# Altium PCB hardware.PcbDoc
Units mm, origin at the board's own origin, x right, y up, seen from the top; angles counter-clockwise.
Board outline 123.32 x 185.55 mm, 2 copper layers (Top Layer, Bottom Layer); 18 components, 34 nets, 119 pads, 30 vias.
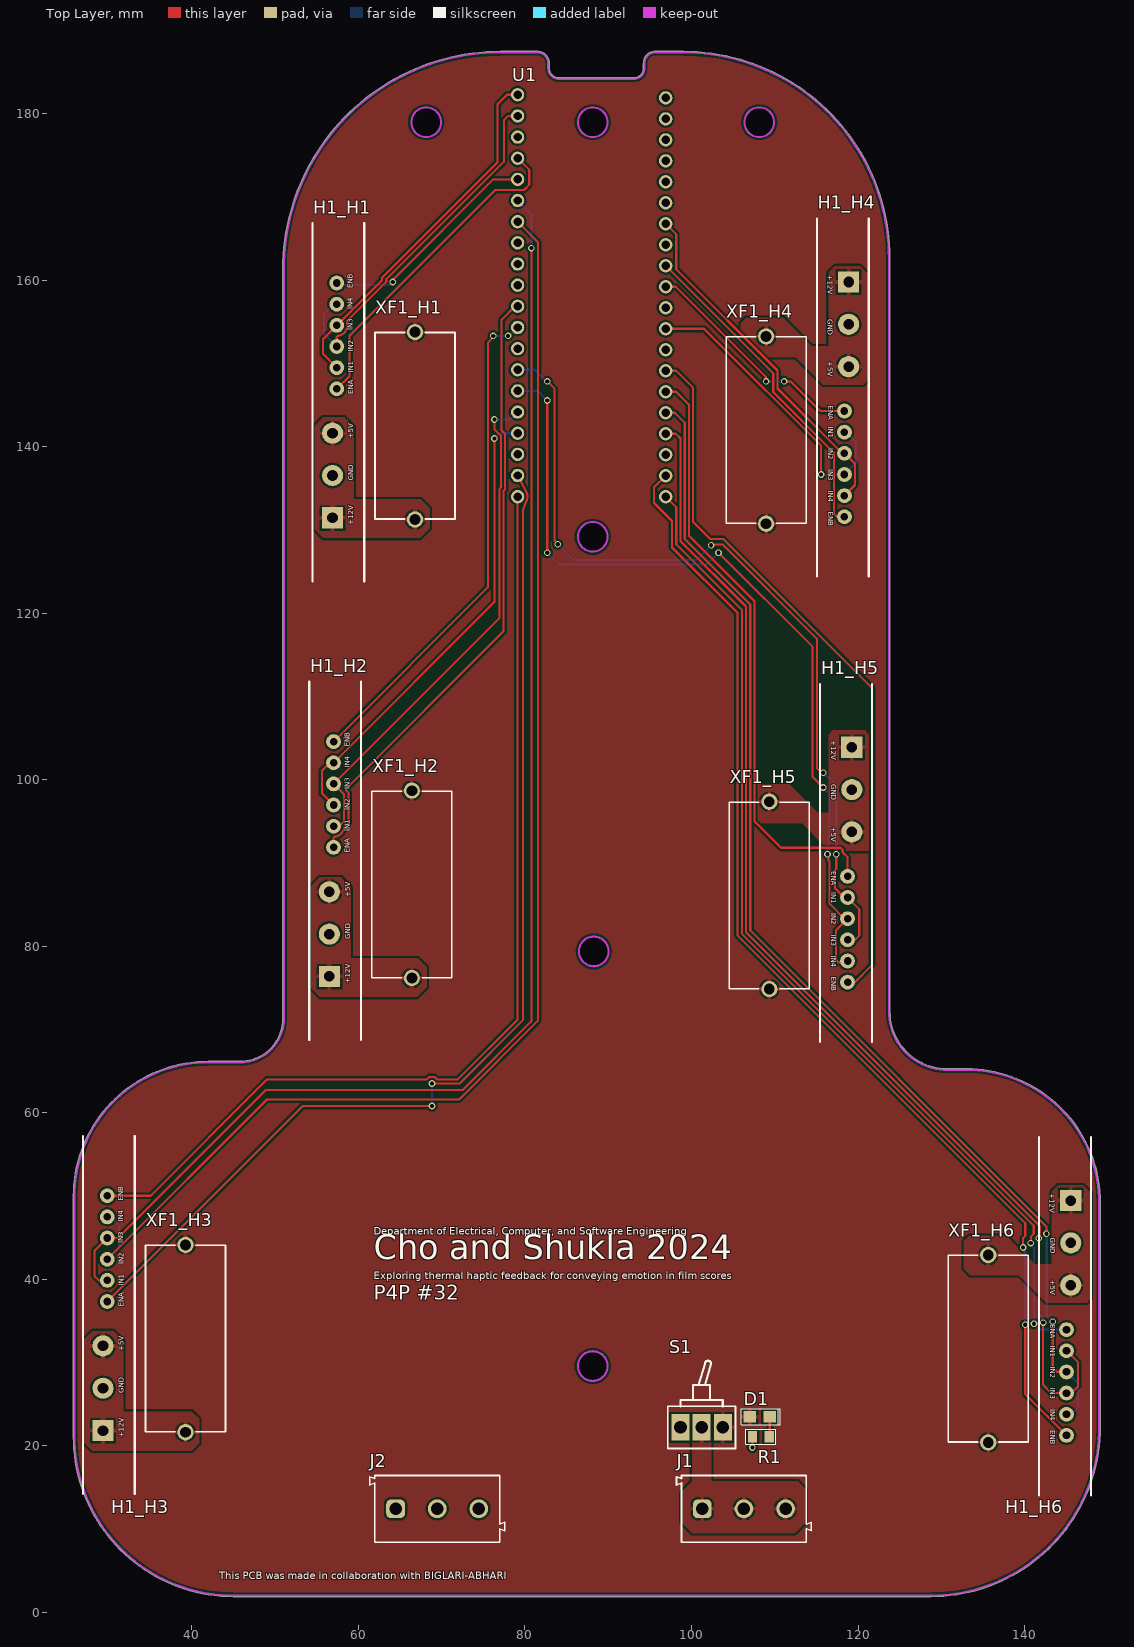
[diagram p0: Top Layer view]
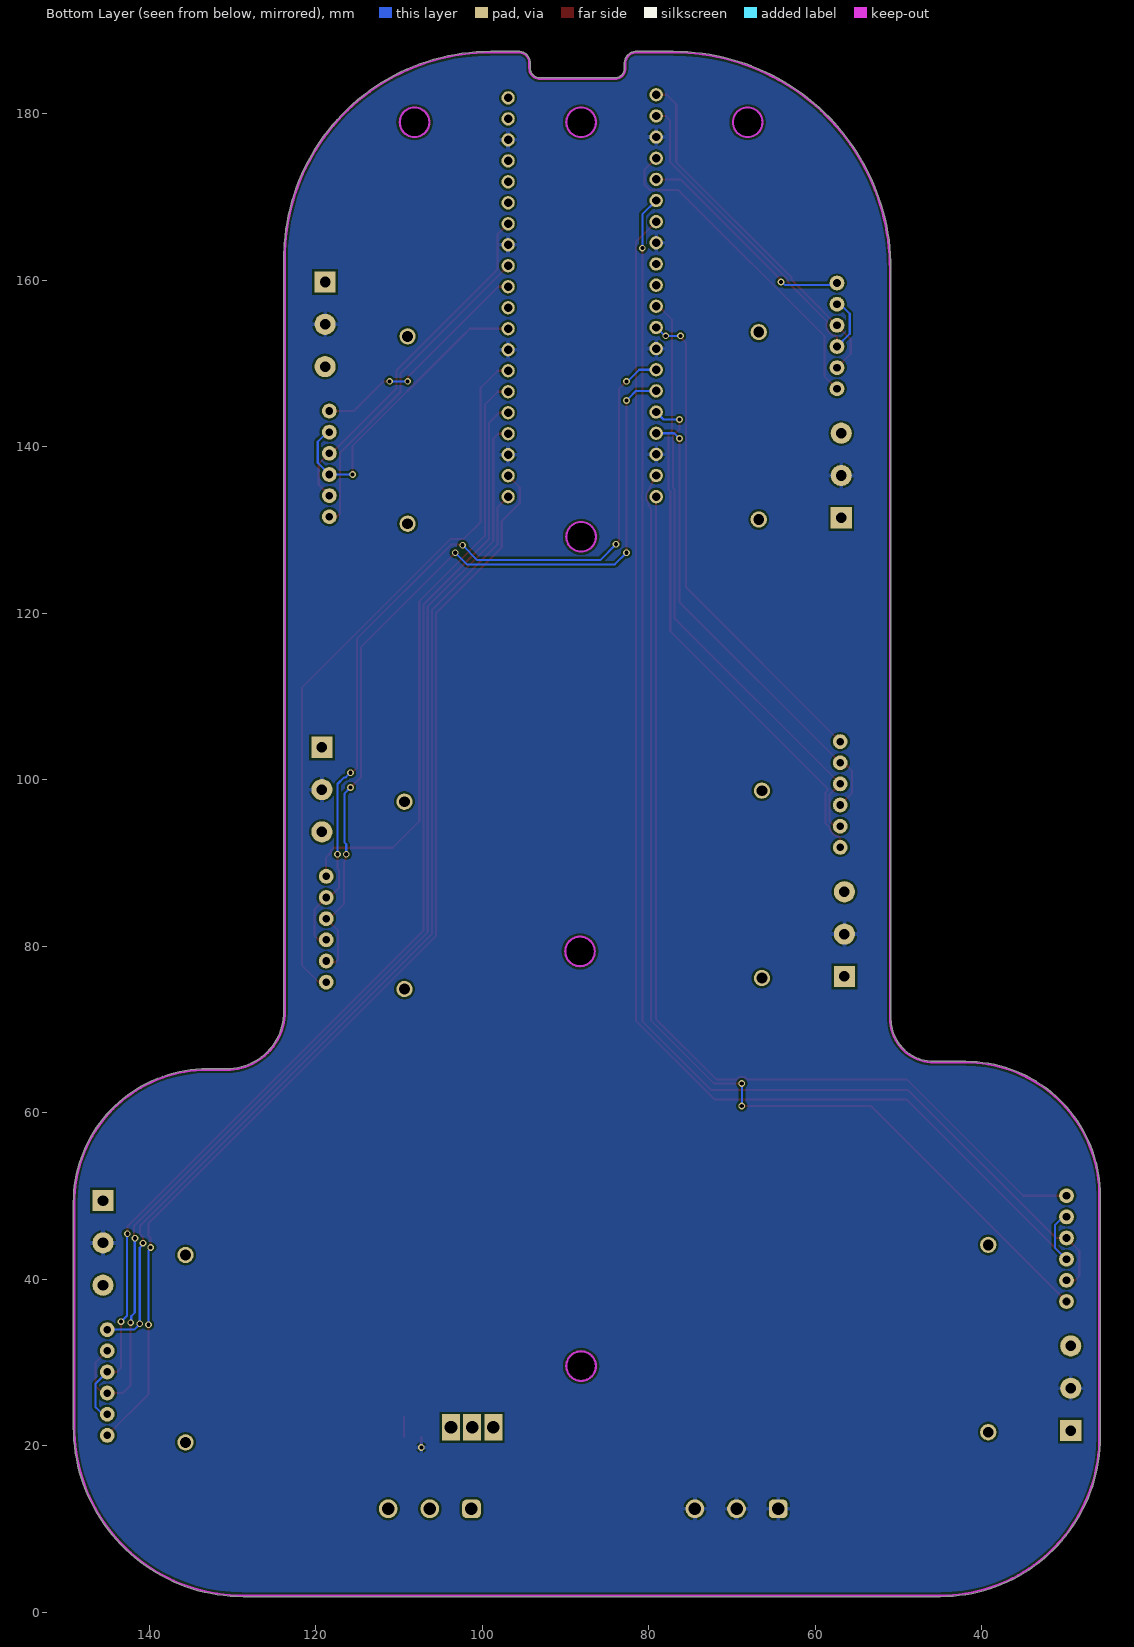
[diagram p1: Bottom Layer view, seen from below]

## Layer stack, top to bottom
Top Solder: solder mask 0.0102, Solder Resist, Dk 3.5
Top Layer: signal copper 0.0356
Dielectric 1: dielectric 0.32, FR-4, Dk 4.8
Bottom Layer: signal copper 0.0356
Bottom Solder: solder mask 0.0102, Solder Resist, Dk 3.5

## Board outline
25.781,21.111 ccw(c44.987,21.111) 44.987,1.905 128.727,1.905 ccw(c128.727,22.276) 149.098,22.276 149.098,49.196 ccw(c133.016,49.196) 133.016,65.278 130.71,65.278 cw(c130.71,72.163) 123.825,72.163 123.825,162.616 ccw(c98.989,162.616) 98.989,187.452 95.631,187.452 ccw(c95.631,186.055) 94.234,186.055 94.234,185.42 cw(c93.091,185.42) 93.091,184.277 84.074,184.277 cw(c84.074,185.42) 82.931,185.42 82.931,186.024 ccw(c81.503,186.024) 81.503,187.452 77.089,187.452 ccw(c77.089,161.29) 50.927,161.29 50.927,71.31 cw(c45.784,71.31) 45.784,66.167 41.949,66.167 ccw(c41.949,49.999) 25.781,49.999
cut-out: 108.138,177.165 cw(c108.138,178.943) 106.36,178.943 cw(c108.138,178.943) 108.138,180.721 cw(c108.138,178.943) 109.916,178.943 cw(c108.138,178.943)
cut-out: 68.138,177.165 cw(c68.138,178.943) 66.36,178.943 cw(c68.138,178.943) 68.138,180.721 cw(c68.138,178.943) 69.916,178.943 cw(c68.138,178.943)
cut-out: 86.36,29.591 ccw(c88.138,29.591) 88.138,27.813 ccw(c88.138,29.591) 89.916,29.591 ccw(c88.138,29.591) 88.138,31.369 ccw(c88.138,29.591)
cut-out: 86.487,79.375 ccw(c88.265,79.375) 88.265,77.597 ccw(c88.265,79.375) 90.043,79.375 ccw(c88.265,79.375) 88.265,81.153 ccw(c88.265,79.375)
cut-out: 88.138,177.165 cw(c88.138,178.943) 86.36,178.943 cw(c88.138,178.943) 88.138,180.721 cw(c88.138,178.943) 89.916,178.943 cw(c88.138,178.943)
cut-out: 88.138,127.381 cw(c88.138,129.159) 86.36,129.159 cw(c88.138,129.159) 88.138,130.937 cw(c88.138,129.159) 89.916,129.159 cw(c88.138,129.159)

## Design rules (kind name [scope] priority, off if disabled: settings)
Clearance [All] p1: gap=0.254 ignorepadtopadclearanceinfootprint=FALSE except(0: Arc-Hole Track-Hole SMDPad-Hole THPad-Hole Via-Hole Fill-Hole Poly-Hole Region-Hole Text-Hole)
PlaneConnect [InNet('VCC')] p1: planeconnectstyle=Relief reliefexpansion=0.508 reliefentries=4 reliefconductorwidth=0.254 reliefairgap=0.254
PolygonConnect PolygonConnect_1 [All] p1: connectstyle=Relief reliefconductorwidth=0.508 reliefentries=4 polygonreliefangle="90 Angle" airgapwidth=0.254
RoomDefinition H4 [InComponentClass('H4')] p1: confinementstyle=ConfineIn formatcopy=TRUE lockcomponents=FALSE outline 103.632,123.952 121.666,123.952 121.666,167.767 103.632,167.767
RoomDefinition H1 [InComponentClass('H1')] p2: confinementstyle=ConfineIn formatcopy=TRUE lockcomponents=FALSE outline 54.102,123.444 72.136,123.444 72.136,167.259 54.102,167.259
RoomDefinition H3 [InComponentClass('H3')] p3: confinementstyle=ConfineIn formatcopy=TRUE lockcomponents=FALSE outline 26.543,13.843 44.577,13.843 44.577,57.658 26.543,57.658
RoomDefinition H6 [InComponentClass('H6')] p4: confinementstyle=ConfineIn formatcopy=TRUE lockcomponents=FALSE outline 130.302,13.642 148.336,13.642 148.336,57.457 130.302,57.457
RoomDefinition H2 [InComponentClass('H2')] p5: confinementstyle=ConfineIn formatcopy=TRUE lockcomponents=FALSE outline 53.721,68.379 71.755,68.379 71.755,112.194 53.721,112.194
RoomDefinition H5 [InComponentClass('H5')] p6: confinementstyle=ConfineIn formatcopy=TRUE lockcomponents=FALSE outline 104.013,68.072 122.047,68.072 122.047,111.887 104.013,111.887
RoutingVias [All] p1: holewidth=0.711 width=1.27 viastyle="Through Hole" minholewidth=0.711 minwidth=1.27 maxholewidth=0.711 maxwidth=1.27
SolderMaskExpansion [All] p1: expansion=0.102 istentingtop=FALSE
Width [All] p1: maxlimit=0.254 minlimit=0.254 preferedwidth=0.254
29 further rules are at their usual default settings.

## Classes and differential pairs
channel class HBridgeInterface: H1 H2 H3 H4 H5 H6
component class HardwareSchematicv2: J1 J2 S1 U1
component class H6: H1_H6 XF1_H6
component class H5: H1_H5 XF1_H5
component class H4: H1_H4 XF1_H4
component class H3: H1_H3 XF1_H3
component class H2: H1_H2 XF1_H2
component class H1: H1_H1 XF1_H1

## Components (designator, comment, footprint, x,y, rotation, side; value= is the part's Value field where it differs from the comment)
D1 "LED_SMT_0805" "0805 LED" 108.204,23.495 r0 top
H1_H1 "L298N Module" "New footprint 1"#1 60.706,123.825 r90 top (schematic designator H1)
H1_H2 "L298N Module" "New footprint 1"#1 60.325,68.76 r90 top (schematic designator H1)
H1_H3 "L298N Module" "New footprint 1"#1 33.147,14.224 r90 top (schematic designator H1)
H1_H4 "L298N Module" "New footprint 1"#1 115.062,167.386 r270 top (schematic designator H1)
H1_H5 "L298N Module" "New footprint 1"#1 115.443,111.506 r270 top (schematic designator H1)
H1_H6 "L298N Module" "New footprint 1"#1 141.732,57.076 r270 top (schematic designator H1)
J1 "691111710003" 691111710003 106.299,12.446 r0 top
J2 "691111710003" 691111710003 69.469,12.446 r0 top
R1 "Res_SMT_0805" "0805 RES" 108.331,21.082 r180 top
S1 "SW-SPDT" SW-SPDT 98.679,22.225 r0 top
U1 "Pico Pi W" "New footprint 1"#2 79.121,182.245 r0 top
XF1_H1 "696103201002" 696103201002 66.802,142.494 r270 top (schematic designator XF1)
XF1_H2 "696103201002" 696103201002 66.421,87.429 r270 top (schematic designator XF1)
XF1_H3 "696103201002" 696103201002 39.243,32.893 r270 top (schematic designator XF1)
XF1_H4 "696103201002" 696103201002 108.966,141.986 r90 top (schematic designator XF1)
XF1_H5 "696103201002" 696103201002 109.347,86.106 r90 top (schematic designator XF1)
XF1_H6 "696103201002" 696103201002 135.636,31.676 r90 top (schematic designator XF1)

## Footprints (in the part's own frame and the unit in brackets; to place one, negate y for a bottom-side part, rotate by r counter-clockwise, add the part's x,y. Pads: shape width x height; smd on the part's side, far side on the other; paste and mask are expansions set on the pad)
"0805 LED" [mm] "RED AS AlGaAs SMD LED, Body; 2mm x 1.25 mm (LxW)"
  rect 1.5x1.4 smd: 1(-1.2,0) 2(1.2,0)
  silkscreen extent -2.2,-0.95 2.45,0.95, body extent -1,-0.63 1,0.63, height 1.1
"0805 RES" [mm] "http://www.digikey.co.nz/Web%20Export/Supplier%20Content/Vishay_8026/PDF/VishayBeyschlag_SolderPad.pdf?redirected=1 with dimension G modified by +0.25mm"
  rect 1.1x1.4 smd: 1(-1,0) 2(1,0)
  silkscreen extent -1.8,-0.9 1.8,0.9, body extent -1.04,-0.66 1.04,0.66, height 0.61
691111710003 [mm] "5,00mm - modular - green - Horizontal entry with pressure clamp - 10,0mm height - 03p"
  rrect50% 2.25x2.25 hole 1.5: 1(-5,0)
  round 2.25 hole 1.5: 2(0,0) 3(5,0)
  silkscreen extent -8.1,-4 8.1,4, body extent -8.1,-4 8.1,4, height 11.05
696103201002 [mm] "FUSEHOLDER BLOCKS - PCB - CLIP COVER - THR"
  round 1.95 hole 1.3: 1(-11.25,0) 2(11.25,0)
  silkscreen extent -11.2,-4.8 11.2,4.8, body extent -12.05,-4.8 12.05,4.8, height 11.55
"New footprint 1"#1 [mil]
  rect 100x100 hole 50 paste+0 mask+4: 1(300,150)
  round 100 hole 50 paste+0 mask+4: 2(500,150) 3(700,150)
  round 70 hole 36 paste+0 mask+4: 4(910,130) 5(1010,130) 6(1110,130) 7(1210,130) 8(1310,130) 9(1410,130)
  silkscreen extent 0,0 1693,245
"New footprint 1"#2 [mil]
  round 62.99 hole 39.37: 1(0,0) 2(0,-100) 3(0,-200) 4(0,-300) 5(0,-400) 6(0,-500) 7(0,-600) 8(0,-700) 9(0,-800) 10(0,-900) 11(0,-1000) 12(0,-1100) 13(0,-1200) 14(0,-1300) 15(0,-1400) 16(0,-1500) 17(0,-1600) 18(0,-1700) 19(0,-1800) 20(0,-1900) 21(700,-1900) 22(700,-1800.79) 23(700,-1701.56) 24(700,-1602.34) 25(700,-1503.12) 26(700,-1403.9) 27(700,-1304.67) 28(700,-1205.45) 29(700,-1106.23) 30(700,-1007.01) 31(700,-907.79) 32(700,-808.57) 33(700,-709.35) 34(700,-610.13) 35(700,-510.91) 36(700,-411.69) 37(700,-312.46) 38(700,-213.24) 39(700,-114.02) 40(700,-14.8)
SW-SPDT [mil]
  rect 85x125 hole 60: 1(0,0) 2(100,0) 3(200,0)
  silkscreen extent -60,-100 260,315

## Part data
D1: library part CMP-016-000004-1, "SMT LED 0805 size", Color=Green, Current - Test=20mA, Lens Color=Colorless, Manufacturer="Lite-On Inc.", Manufacturer Part Number=LTST-C170KGKT, Millicandela Rating=35mcd, Package / Case="0805 (2012 Metric)", Voltage - Forward (Vf) (Typ)=2V, Category=Optoelectronics, Component Type=Standard, ComponentLink1Description=http://optoelectronics.liteon.com/upload/download/DS22-2000-073/LTST-C170KGKT.pdf, ComponentLink1URL=http://optoelectronics.liteon.com/upload/download/DS22-2000-073/LTST-C170KGKT.pdf, Design Item ID=LED_SMT_0805, Features=-, Height (Max)=1.10mm, Lens Style/Size="Rectangle with Flat Top, 1.40mm x 1.25mm", Lens Transparency=Clear, Mounting Type="Surface Mount", Packaging="Cut Tape (CT)", Part Status=Active, Pin Count=2, Pricing 1="1=0.62, 10=0.459, 25=0.338, 100=0.2415, 250=0.16416, 500=0.14486, 1000=0.11347 (NZD)", RoHS="RoHS Compliant", Size / Dimension="2.00mm L x 1.25mm W", Source=EE209_SchLib.SchLib, Stock 1=503069, Viewing Angle=130°, Wavelength - Dominant=571nm, Wavelength - Peak=574nm
H1_H1 H1_H2 H1_H3 H1_H4 H1_H5 H1_H6: library part L298N_Board-2, "Direct conector for H-Bridge"
J1 J2: library part CMP-1502-03263-2, Color=Green, Current=8A, Max Operating Temperature=105°C, Min Operating Temperature=-40°C, Voltage=300V, Contact Material=Brass, Contact Plating=Tin, Current Rating=8A, Height=14mm, Housing Material=Nylon, Lead Pitch=5mm, Length=7.6mm, Mount="Through Hole", NexarPartId=8917709, Number of Contacts=3, Number of Levels=1, Number of Pins=3, Number of Positions Per Level=3, Packaging=Box, Pitch=5.0038mm, Plating=Steel, REACH SVHC=Unknown, RoHS=Compliant, Stripping Length=-6mm, Termination=Screw, Voltage Rating=300V, Width=16.2mm, Wire Gauge (Max)=26AWG, Wire Gauge (Min)=14AWG, Wire/Cable Gauge=26AWG
R1: library part CMP-019-000000-1, "0805 resistor", Component Type=Standard, Design Item ID=Res_SMT_0805, LatestRevisionDate=17-Jul-2002, LatestRevisionNote="Re-released for DXP Platform.", PackageReference=AXIAL-0.4, Pin Count=2, Published=8-Jun-2000, Publisher="Altium Limited", Source=EE209_SchLib.SchLib
S1: library part CMP-025-000001-1, "Toggle Switch", Component Type=Standard, Design Item ID=SW-SPDT, Pin Count=3, Source=COMSYS301.SCHLIB
U1: library part Pico-Pi-W-1, "micro"
XF1_H1 XF1_H2 XF1_H3 XF1_H4 XF1_H5 XF1_H6: library part CMP-1502-00239-2, NexarPartId=82221271, Packaging=Box, RoHS=Non-Compliant

## Via types
v1: diameter 0.8, hole 0.5, Top Layer to Bottom Layer, 30 vias

## Nets (pads, with @x,y where several pads share a name; then routed paths per layer and width w, separated by ;. In a path a pad name is that pad's centre, name@x,y a point inside that pad or via, vN(x,y) a via of type N, cw(c..) or ccw(c..) an arc to the next point about the centre after c; other vN are vias at no path point)
GND: H1_H1.2 H1_H2.2 H1_H3.2 H1_H4.2 H1_H5.2 H1_H6.2 J2.1 J2.2 J2.3 R1.2 U1.3 U1.8 U1.13 U1.18 U1.23 U1.28 U1.33 U1.38 | length 1.3
  Top Layer w0.254: v1(107.315,19.812) 107.331,19.828 R1.2
GP0: H1_H1.5 H1_H1.7 U1.1 | length 43.9
  Top Layer w0.254: H1_H1.5 55.753,151.13 55.753,152.908 62.846,160.001 62.846,160.3 76.708,174.162 76.708,181.102 77.851,182.245 U1.1
GP1: H1_H1.6 H1_H1.8 U1.2 | length 44.1
  Top Layer w0.254: H1_H1.6 57.404,153.056 57.404,153.14 57.454,153.208 cw(c57.658,153.056) 57.53,153.276 57.553,153.289 57.578,153.297 cw(c57.658,153.056) 57.615,153.307 ccw(c57.404,154.559) 58.622,154.918 58.622,154.953 58.622,155.059 63.354,159.791 63.354,160.089 77.47,174.206 77.47,179.197 77.978,179.705 U1.2
  Bottom Layer w0.254: H1_H1.6 55.88,153.543 55.88,155.956 57.023,157.099 H1_H1.8
GP2: H1_H1.4 U1.4 | length 39.8
  Top Layer w0.254: H1_H1.4 58.928,148.463 58.928,153.289 76.454,170.815 79.883,170.815 80.518,171.45 80.518,173.228 U1.4
GP3: H1_H1.9 U1.5 | length 27.1
  Top Layer w0.254: v1(64.135,159.766) 64.239,159.87 64.239,160.124 76.2,172.085 U1.5
  Bottom Layer w0.254: H1_H1.9 57.658,159.385 63.627,159.385 v1@64.014,159.772
GP4: H1_H3.5 H1_H3.7 U1.6 | length 167.9
  Top Layer w0.254: H1_H3.5 28.829,39.878 28.321,40.386 28.321,43.434 H1_H3.7 31.115,44.958 48.895,62.738 72.517,62.738 80.772,70.993 80.772,133.629 ccw(c79.121,133.985) 80.772,134.341 v1(80.772,163.83)
  Bottom Layer w0.254: U1.6 80.772,167.894 v1(80.772,163.83)
GP5: H1_H3.6 H1_H3.8 U1.7 | length 167
  Top Layer w0.254: H1_H3.6 49.022,61.595 72.092,61.595 81.553,71.056 81.553,164.573 U1.7
  Bottom Layer w0.254: H1_H3.6 31.242,43.815 31.242,46.482 30.226,47.498 H1_H3.8
GP8: H1_H2.4 U1.11 | length 75
  Top Layer w0.254: H1_H2.4 57.023,92.911 57.023,92.995 57.073,93.063 cw(c57.277,92.911) 57.149,93.131 57.172,93.144 57.197,93.152 cw(c57.277,92.911) 57.234,93.162 ccw(c57.023,94.414) 58.285,94.269 58.801,94.786 58.801,98.434 58.53,98.705 58.53,98.916 77.432,117.818 77.432,134.685 77.616,134.869 77.616,141.504 77.197,141.923 77.197,155.235 78.807,156.845 U1.11
GP9: H1_H2.9 U1.12 | length 60
  Top Layer w0.254: H1_H2.9 75.546,123.097 75.546,152.487 76.2,153.141 v1(76.2,153.289)
  Bottom Layer w0.254: v1(76.2,153.289) v1(77.978,153.289) 78.105,153.289 U1.12
GP10: H1_H5.5 H1_H5.7 U1.14 | length 101.3
  Top Layer w0.254: v1(82.677,147.828) 83.566,146.939 83.566,128.692 83.947,128.311 v1(83.947,128.27) ; v1(102.362,128.143) 102.466,128.247 103.738,128.247 115.062,116.923 115.062,101.36 115.242,101.181 115.334,101.181 115.676,100.838 v1(115.824,100.838) ; v1(117.386,91.04) 117.386,89.29 117.221,89.125 117.221,86.995 118.364,85.852 H1_H5.5 120.142,84.455 120.142,81.28 119.634,80.772 H1_H5.7
  Bottom Layer w0.254: U1.14 81.153,149.225 v1@82.423,147.955 ; v1(83.947,128.27) 85.852,126.365 100.584,126.365 v1(102.362,128.143) ; v1(115.824,100.838) 116.387,100.275 116.596,100.275 117.386,99.486 v1(117.386,91.04)
GP11: H1_H5.6 H1_H5.8 U1.15 | length 101.6
  Top Layer w0.254: v1(82.677,127.254) v1(82.677,145.542) ; v1(103.251,127.254) 114.554,115.951 114.554,100.33 v1(115.824,99.06) ; v1(116.332,91.04) 116.436,90.936 116.436,90.301 116.586,90.151 116.586,85.09 118.364,83.312 H1_H5.6 117.348,81.915 117.348,78.359 117.624,78.083 118.596,78.083 H1_H5.8
  Bottom Layer w0.254: U1.15 81.534,146.685 v1@82.423,145.796 ; v1(82.677,127.254) 84.074,125.857 101.854,125.857 v1(103.251,127.254) ; v1(115.824,99.06) 116.567,98.317 116.567,92.475 116.332,92.24 v1(116.332,91.04)
GP12: H1_H2.5 H1_H2.7 U1.16 | length 62.1
  Top Layer w0.254: H1_H2.5 57.711,94.414 58.293,94.996 58.293,98.224 H1_H2.7 76.924,119.395 76.924,134.895 77.108,135.079 77.108,141.293 76.327,142.075 v1(76.327,143.256)
  Bottom Layer w0.254: v1(76.327,143.256) 78.232,143.256 U1.16
GP13: H1_H2.6 H1_H2.8 U1.17 | length 56.5
  Top Layer w0.254: H1_H2.6 55.626,98.351 55.626,101.092 56.151,101.617 56.194,101.617 56.611,102.034 H1_H2.8 76.327,121.338 v1(76.327,140.97)
  Bottom Layer w0.254: v1(76.327,140.97) 76.962,141.605 U1.17
GP14: H1_H3.4 U1.19 | length 131.3
  Top Layer w0.254: H1_H3.4 53.321,60.814 v1(68.834,60.814) ; v1(68.834,63.519) 68.853,63.5 72.136,63.5 79.756,71.12 79.756,132.288 79.756,132.393 80.217,133.546 ccw(c79.121,133.985) 80.167,134.534 U1.19
  Bottom Layer w0.254: v1(68.834,60.814) v1(68.834,63.519)
GP15: H1_H3.9 U1.20 | length 121.1
  Top Layer w0.254: H1_H3.9 35.052,50.038 49.022,64.008 68.218,64.008 68.511,64.3 69.157,64.3 69.45,64.008 71.926,64.008 79.121,71.203 U1.20
GP16: H1_H6.4 U1.21 | length 122.2
  Top Layer w0.254: U1.21 98.171,132.715 98.171,128.27 106.045,120.396 106.045,81.49 141.104,46.432 141.104,45.476 140.753,45.126 140.753,44.36 v1(140.738,44.345)
  Bottom Layer w0.254: v1(140.738,44.345) 140.738,44.197 141.127,43.808 141.127,34.701 v1@141.1,34.674 ; v1(141.127,34.675) 141.127,34.641 141.806,33.962 H1_H6.4
GP17: H1_H6.9 U1.22 | length 136.5
  Top Layer w0.254: U1.22 95.504,135.108 95.504,133.223 97.663,131.064 97.663,127.889 105.537,120.015 105.537,81.28 140.081,46.736 140.081,45.222 139.827,44.968 v1(139.827,43.815) ; v1(140.081,34.544) 140.081,26.215 H1_H6.9
  Bottom Layer w0.254: v1(139.827,43.815) 139.827,43.667 140.081,43.413 v1(140.081,34.544)
GP18: H1_H6.5 H1_H6.7 U1.24 | length 143.6
  Top Layer w0.254: U1.24 98.103,141.546 98.679,140.97 98.679,128.651 106.479,120.851 106.553,120.777 106.553,81.701 141.84,46.414 141.84,45.612 141.81,45.582 141.81,45.048 v1(141.706,44.943) ; v1(142.232,34.801) 142.232,27.313 143.203,26.342 H1_H6.7 145.595,26.342 146.431,27.178 146.431,30.025 H1_H6.5
  Bottom Layer w0.254: v1(141.706,44.943) 141.732,44.917 141.732,36.005 142.155,35.582 142.155,34.879 v1(142.232,34.801)
GP19: H1_H6.6 H1_H6.8 U1.25 | length 143
  Top Layer w0.254: U1.25 97.996,144.066 99.187,142.875 99.187,128.905 107.061,121.031 107.061,81.911 142.621,46.351 v1(142.621,45.466) ; v1(143.383,34.925) 143.383,29.404 143.905,28.882 H1_H6.6
  Bottom Layer w0.254: v1(142.621,45.466) 142.663,45.424 142.663,35.645 v1(143.383,34.925) ; H1_H6.8 145.595,23.802 146.431,24.638 146.431,27.485 H1_H6.6
GP20: H1_H5.4 U1.26 | length 72.2
  Top Layer w0.254: U1.26 98.143,146.586 99.695,145.034 99.695,129.286 107.569,121.412 107.569,94.996 110.744,91.821 117.891,91.821 118.167,91.545 118.167,91.256 118.745,90.678 H1_H5.4
GP21: H1_H5.9 U1.27 | length 87.1
  Top Layer w0.254: U1.27 98.163,149.106 100.203,147.066 100.203,130.937 102.216,128.924 103.78,128.924 121.666,111.038 121.666,77.724 119.634,75.692 H1_H5.9
GP22: H1_H4.5 H1_H4.7 U1.29 | length 36.9
  Top Layer w0.254: U1.29 101.504,154.147 102.489,153.162 115.57,140.081 v1(115.57,136.652)
  Bottom Layer w0.254: v1@115.824,136.779 115.951,136.652 H1_H4.7 119.761,138.049 119.761,140.589 118.618,141.732 H1_H4.5
GP26: H1_H4.4 U1.31 | length 27.9
  Top Layer w0.254: U1.31 98.115,159.187 108.922,148.38 108.922,147.872 v1(108.966,147.828) ; v1(111.125,147.828) 111.144,147.809 111.906,147.809 115.443,144.272 H1_H4.4
  Bottom Layer w0.254: v1(108.966,147.828) v1(111.125,147.828)
GP27: H1_H4.9 U1.32 | length 39.5
  Top Layer w0.254: U1.32 109.814,148.794 109.814,146.555 117.094,139.275 117.094,131.953 117.475,131.572 H1_H4.9
GP28: H1_H4.6 H1_H4.8 U1.34 | length 42.7
  Top Layer w0.254: U1.34 98.171,165.478 98.171,161.29 110.322,149.139 110.322,146.98 118.11,139.192 H1_H4.6 119.634,137.922 119.634,135.382 H1_H4.8
NetD1_2: D1.2 R1.1 | length 2.4
  Top Layer w0.254: R1.1 109.404,21.155 D1.2
NetH1_H1_1: H1_H1.1 H1_H1.3 XF1_H1.2
NetH1_H2_1: H1_H2.1 H1_H2.3 XF1_H2.2
NetH1_H3_1: H1_H3.1 H1_H3.3 XF1_H3.2
NetH1_H4_1: H1_H4.1 H1_H4.3 XF1_H4.2
NetH1_H5_1: H1_H5.1 H1_H5.3 XF1_H5.2
NetH1_H6_1: H1_H6.1 H1_H6.3 XF1_H6.2
NetJ1_1: J1.1 J1.2 J1.3 S1.2
VCC: D1.1 S1.3 XF1_H1.1 XF1_H2.1 XF1_H3.1 XF1_H4.1 XF1_H5.1 XF1_H6.1
pads on no net: S1.1 U1.9 U1.10 U1.30 U1.35 U1.36 U1.37 U1.39 U1.40

## Polygon pours and split planes (outlines as drawn)
NetJ1_1 on Top Layer "NETJ1_1_L01_P000" (solid, remove dead copper, pour order 0): 100.076,24.511 100.076,15.748 98.806,14.478 98.806,10.795 100.076,9.525 112.395,9.525 113.665,10.795 113.665,14.859 112.776,15.748 102.362,15.748 102.362,24.511
VCC on Top Layer "VCC_L01_P015" (solid, remove dead copper, pour order 15): 17.018,192.913 17.145,193.04 151.257,193.04 151.257,0 16.129,0
NetH1_H1_1 on Top Layer "NETH1_H1_1_L01_P012" (solid, pour order 12): 55.753,143.51 54.737,142.494 54.737,132.715 59.436,132.715 59.436,142.367 58.293,143.51
NetH1_H2_1 on Top Layer "NETH1_H2_1_L01_P011" (solid, pour order 11): 55.372,88.265 54.356,87.249 54.356,77.47 59.055,77.47 59.055,87.122 57.912,88.265
NetH1_H3_1 on Top Layer "NETH1_H3_1_L01_P010" (solid, pour order 10): 28.067,33.782 27.051,32.766 27.051,22.987 31.75,22.987 31.75,32.639 30.607,33.782
NetH1_H6_1 on Top Layer "NETH1_H6_1_L01_P009" (solid, pour order 9): 144.018,51.308 143.256,50.546 143.256,40.767 147.955,40.767 147.955,50.419 147.066,51.308
NetH1_H5_1 on Top Layer "NETH1_H5_1_L01_P008" (solid, pour order 8): 116.967,105.918 116.459,105.41 116.459,95.377 121.285,95.377 121.285,105.41 120.777,105.918
NetH1_H4_1 on Top Layer "NETH1_H4_1_L01_P007" (solid, pour order 7): 117.221,161.671 116.459,160.909 116.459,151.13 121.158,151.13 121.158,160.782 120.269,161.671
NetH1_H3_1 on Top Layer "NETH1_H3_1_L01_P006" (solid, pour order 6): 28.055,24.118 27.051,23.114 27.051,20.447 28.067,19.431 40.005,19.431 40.894,20.32 40.894,23.241 40.005,24.13
NetH1_H2_1 on Top Layer "NETH1_H2_1_L01_P005" (solid, pour order 5): 55.36,78.601 54.356,77.597 54.356,74.93 55.372,73.914 67.056,73.914 68.199,75.057 68.199,77.47 67.119,78.549
NetH1_H4_1 on Top Layer "NETH1_H4_1_L01_P004" (solid, pour order 4): 105.918,154.813 105.918,151.511 106.68,150.749 112.522,150.749 115.824,147.447 120.65,147.447 121.158,147.955 121.158,151.384 120.523,152.019 114.427,152.019 110.998,155.448 106.553,155.448
NetH1_H5_1 on Top Layer "NETH1_H5_1_L01_P003" (solid, pour order 3): 106.68,98.806 106.68,95.504 107.442,94.742 113.284,94.742 116.586,91.44 121.412,91.44 121.412,95.504 120.904,96.012 115.189,96.012 111.76,99.441 107.315,99.441
NetH1_H6_1 on Top Layer "NETH1_H6_1_L01_P002" (solid, pour order 2): 132.715,44.577 132.715,41.275 133.477,40.513 139.319,40.513 142.621,37.211 147.447,37.211 147.955,37.719 147.955,41.148 147.32,41.783 141.224,41.783 137.795,45.212 133.35,45.212
NetH1_H1_1 on Top Layer "NETH1_H1_1_L01_P001" (solid, pour order 1): 55.741,133.719 54.737,132.715 54.737,130.048 55.753,129.032 67.437,129.032 68.58,130.175 68.58,132.588 67.5,133.667
GND on Bottom Layer "GND_L02_P014" (solid, remove dead copper, pour order 14): 21.971,188.976 21.971,0.635 22.479,0.127 151.765,0.127 151.765,189.738 151.257,190.246

## Keep-outs
Keep-Out Layer:
  circle w0.254: c108.138,178.943 r1.778
  circle w0.254: c68.138,178.943 r1.778
  circle w0.254: c88.138,129.159 r1.778
  circle w0.254: c88.138,178.943 r1.778
  circle w0.254: c88.265,79.375 r1.778
  circle w0.254: c88.138,29.591 r1.778
  lines w0.254: 128.651,2.032 79.629,2.032 44.987,2.032 cw(c44.987,21.111) 25.908,21.111 25.908,49.999 cw(c41.949,49.999) 41.949,66.04 45.784,66.04 ccw(c45.784,71.31) 51.054,71.31 51.054,161.29 cw(c77.089,161.29) 77.089,187.325 81.503,187.325 cw(c81.503,186.024) 82.804,186.024 82.804,185.42 ccw(c84.074,185.42) 84.074,184.15 93.091,184.15 ccw(c93.091,185.42) 94.361,185.42 94.361,186.055 cw(c95.631,186.055) 95.631,187.325 98.989,187.325 cw(c98.989,162.616) 123.698,162.616 123.698,72.163 ccw(c130.71,72.163) 130.71,65.151 133.016,65.151 cw(c133.016,49.196) 148.971,49.196 148.971,22.276 cw(c128.727,22.276) 128.727,2.032

## Silkscreen, mask and mechanical layers (free items; w line width, h text height)
Top Overlay:
  text "Department of Electrical, Computer, and Software Engineering" at 61.849,45.038 h1.52
  text "Cho and Shukla 2024" at 61.852,41.438 h5
  text "Exploring thermal haptic feedback for conveying emotion in film scores" at 61.849,39.704 h1.52
  text "P4P #32" at 61.849,36.979 h3
  text "This PCB was made in collaboration with BIGLARI-ABHARI" at 43.307,3.694 h1.52

## Text inside footprints (layer, text, board x,y; h text height)
H1_H1: Top Overlay "+5V" at 59.622,140.958 h1.02 r90; Top Overlay "GND" at 59.626,135.901 h1.02 r90; Top Overlay "+12V" at 59.629,130.567 h1.02 r90; Top Overlay "ENB" at 59.588,159.013 h1.02 r90; Top Overlay "IN4" at 59.588,156.49 h1.02 r90; Top Overlay "IN3" at 59.581,153.942 h1.02 r90; Top Overlay "IN2" at 59.614,151.396 h1.02 r90; Top Overlay "IN1" at 59.614,148.851 h1.02 r90; Top Overlay "ENA" at 59.614,146.305 h1.02 r90
H1_H2: Top Overlay "+5V" at 59.241,85.893 h1.02 r90; Top Overlay "GND" at 59.245,80.836 h1.02 r90; Top Overlay "+12V" at 59.248,75.502 h1.02 r90; Top Overlay "ENB" at 59.207,103.948 h1.02 r90; Top Overlay "IN4" at 59.207,101.425 h1.02 r90; Top Overlay "IN3" at 59.2,98.877 h1.02 r90; Top Overlay "IN2" at 59.233,96.331 h1.02 r90; Top Overlay "IN1" at 59.233,93.786 h1.02 r90; Top Overlay "ENA" at 59.233,91.24 h1.02 r90
H1_H3: Top Overlay "+5V" at 32.063,31.357 h1.02 r90; Top Overlay "GND" at 32.067,26.3 h1.02 r90; Top Overlay "+12V" at 32.07,20.966 h1.02 r90; Top Overlay "ENB" at 32.029,49.412 h1.02 r90; Top Overlay "IN4" at 32.029,46.889 h1.02 r90; Top Overlay "IN3" at 32.022,44.341 h1.02 r90; Top Overlay "IN2" at 32.055,41.795 h1.02 r90; Top Overlay "IN1" at 32.055,39.25 h1.02 r90; Top Overlay "ENA" at 32.055,36.704 h1.02 r90
H1_H4: Top Overlay "+5V" at 116.146,150.253 h1.02 r270; Top Overlay "GND" at 116.142,155.31 h1.02 r270; Top Overlay "+12V" at 116.139,160.644 h1.02 r270; Top Overlay "ENB" at 116.18,132.198 h1.02 r270; Top Overlay "IN4" at 116.18,134.721 h1.02 r270; Top Overlay "IN3" at 116.187,137.269 h1.02 r270; Top Overlay "IN2" at 116.154,139.815 h1.02 r270; Top Overlay "IN1" at 116.154,142.36 h1.02 r270; Top Overlay "ENA" at 116.154,144.906 h1.02 r270
H1_H5: Top Overlay "+5V" at 116.527,94.373 h1.02 r270; Top Overlay "GND" at 116.523,99.43 h1.02 r270; Top Overlay "+12V" at 116.52,104.764 h1.02 r270; Top Overlay "ENB" at 116.561,76.318 h1.02 r270; Top Overlay "IN4" at 116.561,78.841 h1.02 r270; Top Overlay "IN3" at 116.568,81.389 h1.02 r270; Top Overlay "IN2" at 116.535,83.935 h1.02 r270; Top Overlay "IN1" at 116.535,86.48 h1.02 r270; Top Overlay "ENA" at 116.535,89.026 h1.02 r270
H1_H6: Top Overlay "+5V" at 142.816,39.943 h1.02 r270; Top Overlay "GND" at 142.812,45 h1.02 r270; Top Overlay "+12V" at 142.809,50.334 h1.02 r270; Top Overlay "ENB" at 142.85,21.888 h1.02 r270; Top Overlay "IN4" at 142.85,24.411 h1.02 r270; Top Overlay "IN3" at 142.857,26.959 h1.02 r270; Top Overlay "IN2" at 142.824,29.505 h1.02 r270; Top Overlay "IN1" at 142.824,32.05 h1.02 r270; Top Overlay "ENA" at 142.824,34.596 h1.02 r270